# Allegro board SCHEDA ASSE.brd
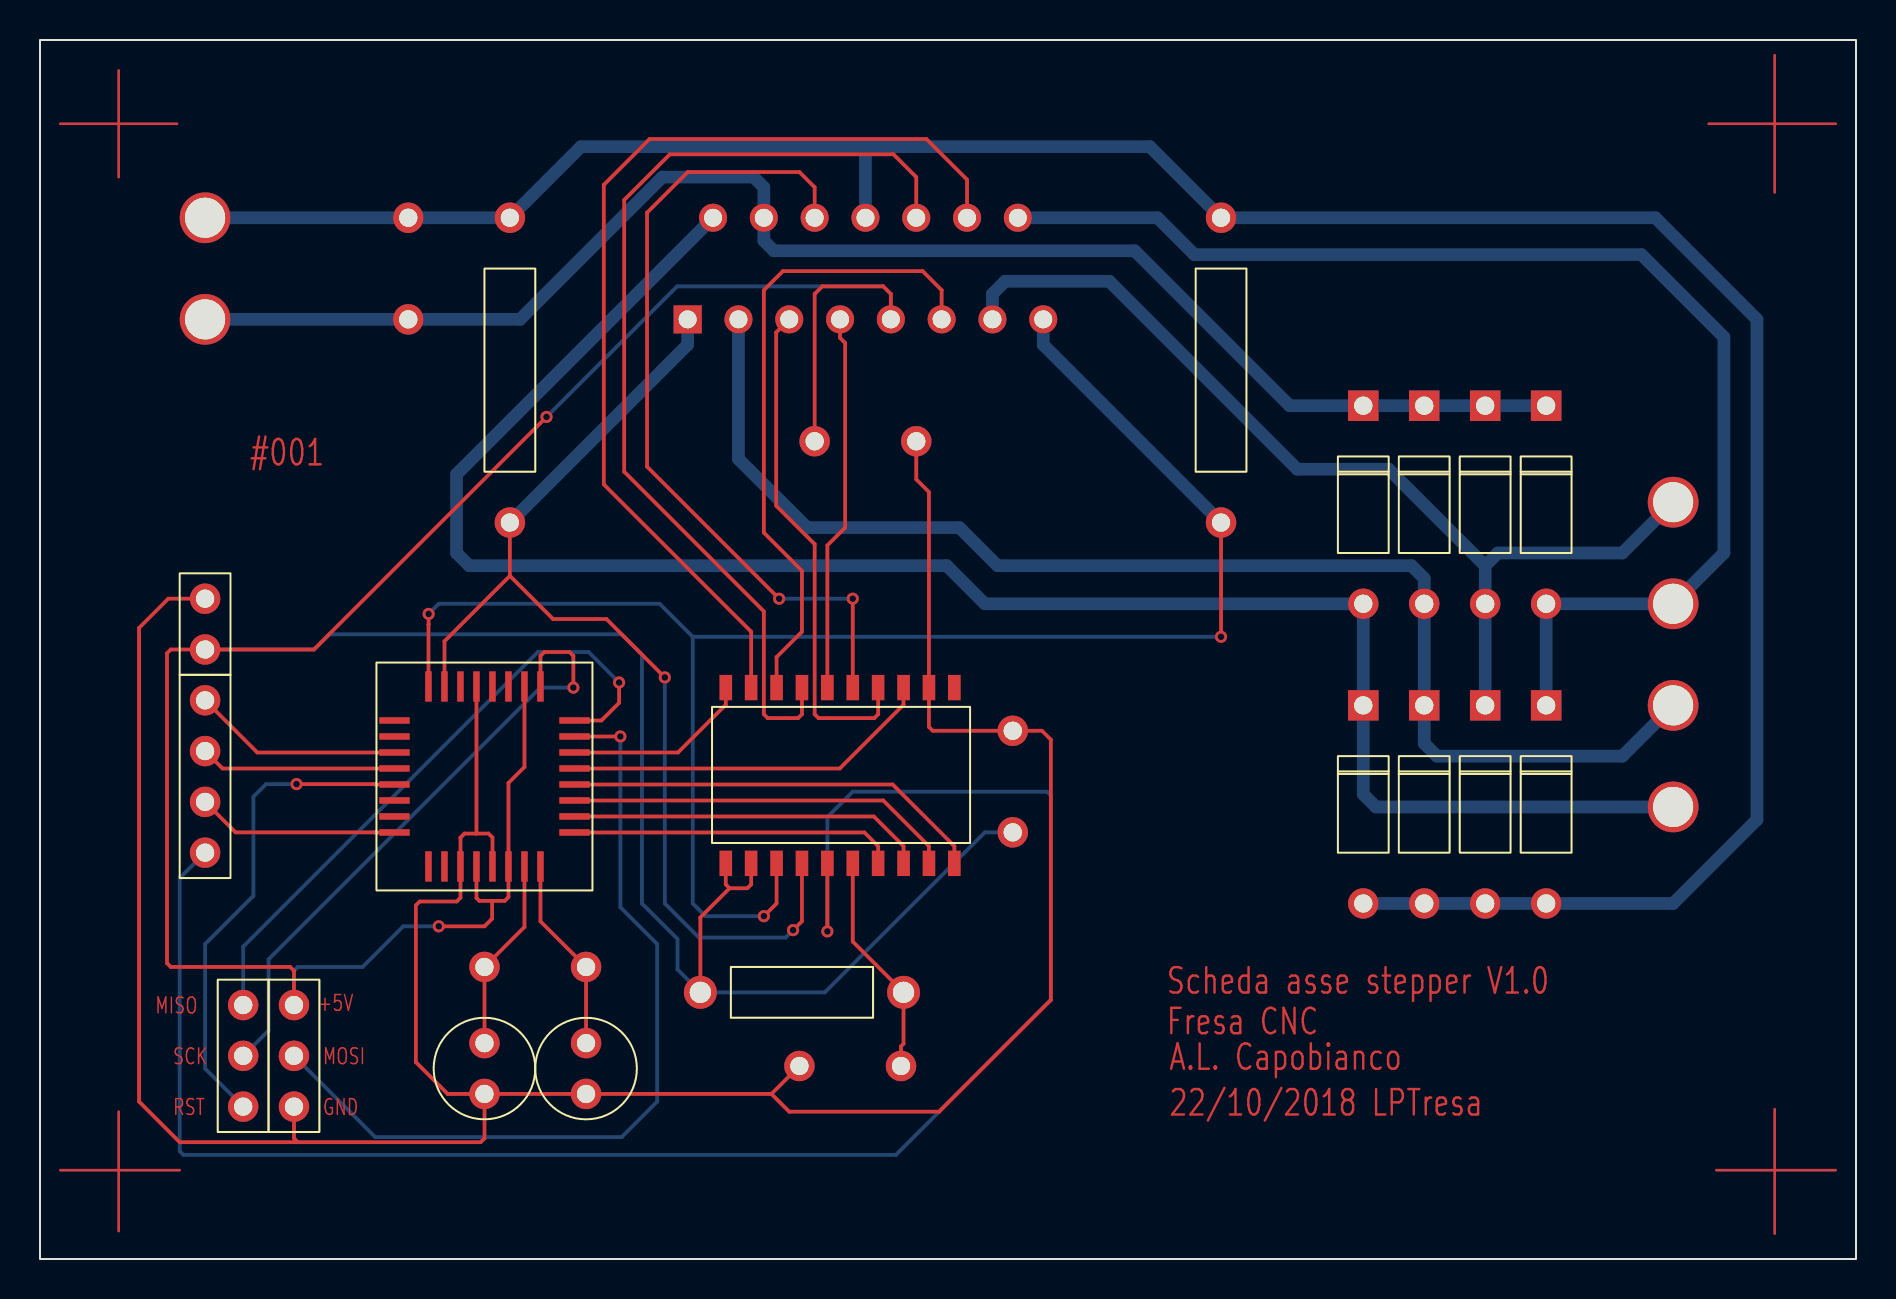
[diagram p0: board, top side]
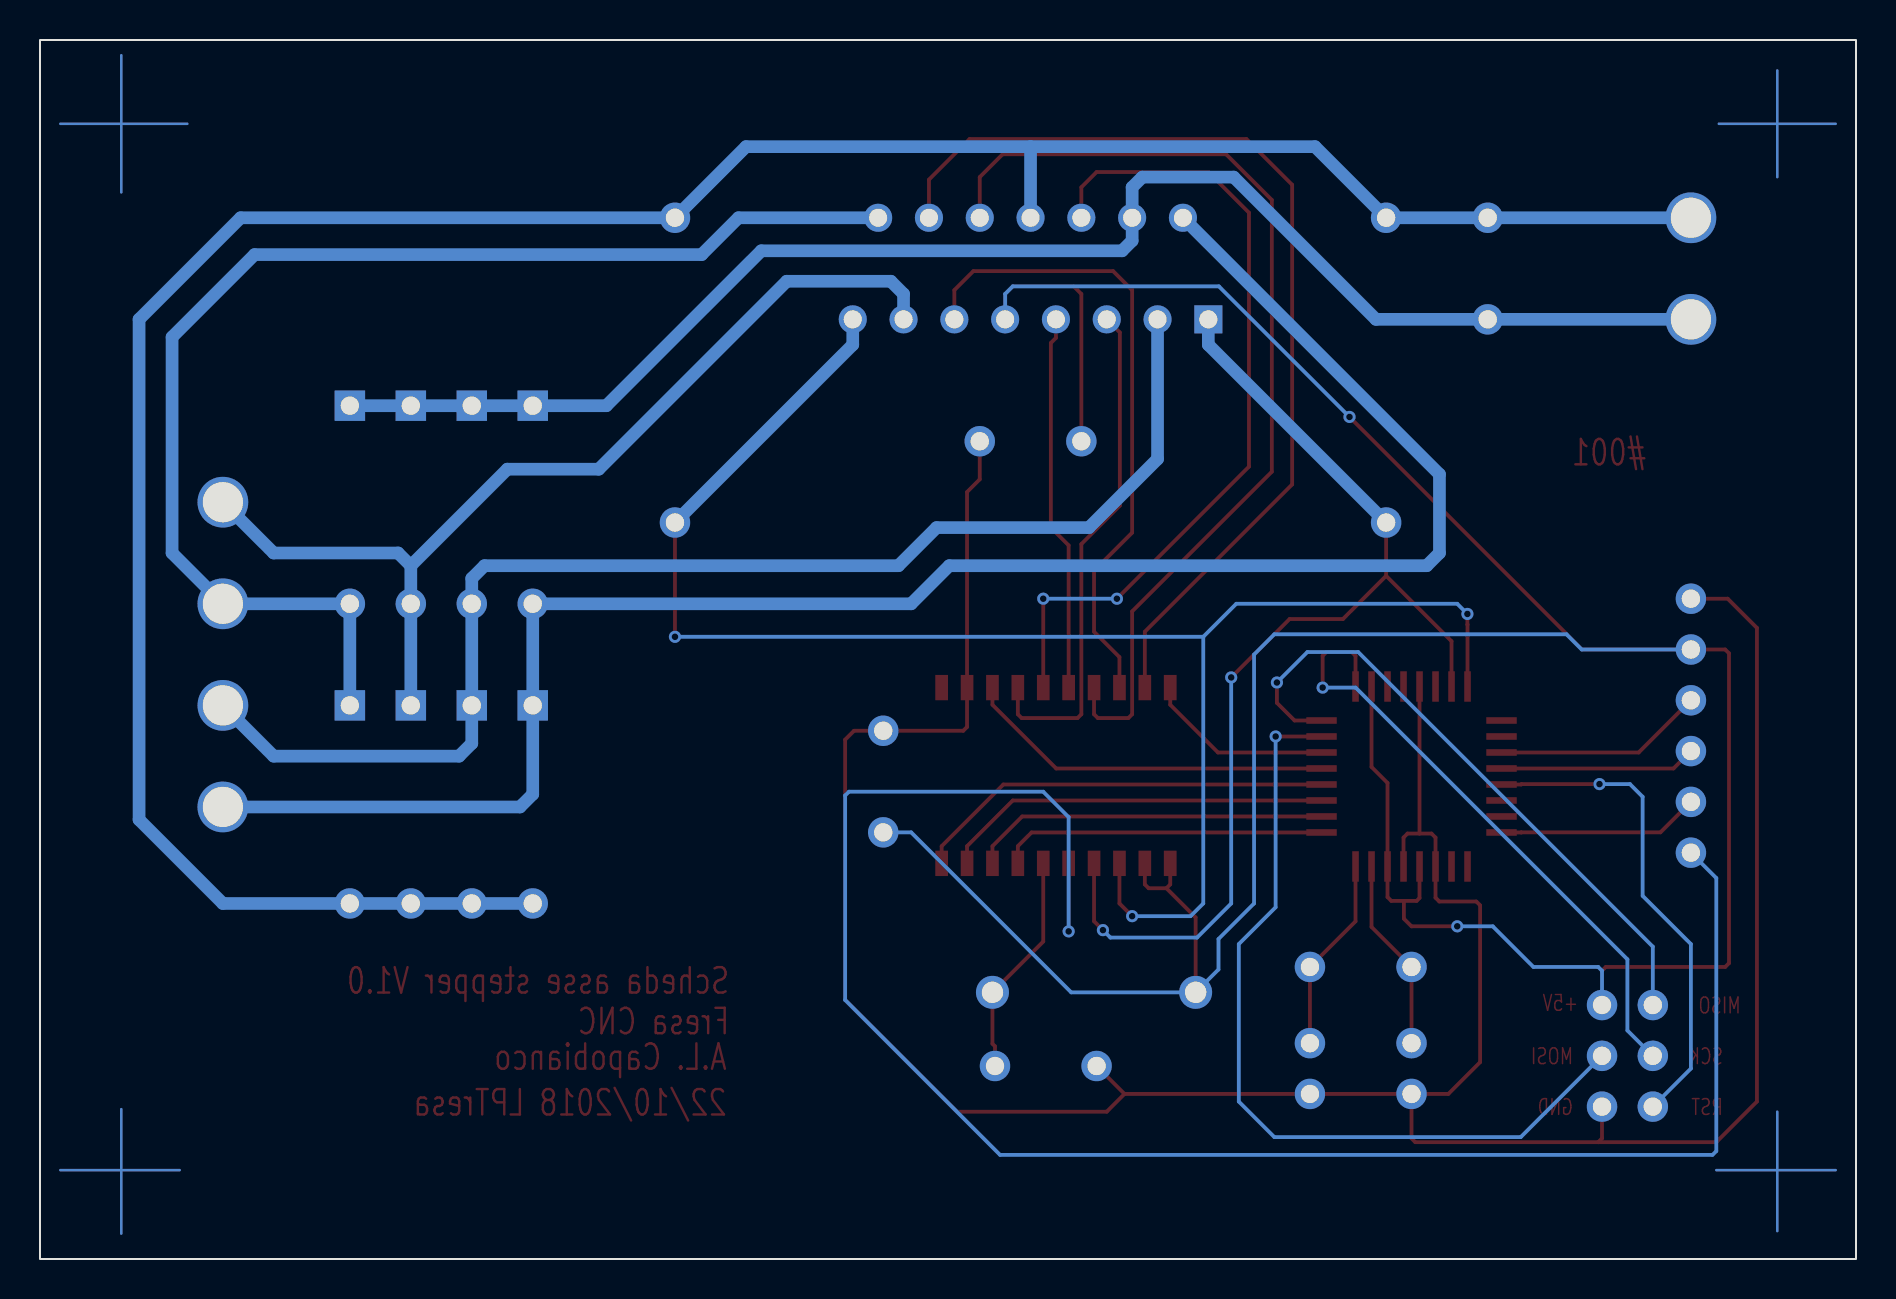
[diagram p1: board, bottom side, seen from below]

Outline 90.81 x 60.96 mm; copper layers: TOP, BOTTOM. Coordinates in mm from the lower left corner of the outline.
Outline path: rectangle 0,0 90.81,60.96

## Design rules (mm)
nets with their own width: min track width 0.191; nets +5V +24V CHOP REF EMERGENZA GND GND_EARTH MISO MOSI N00233 N00235 N00237 N00239 N00241 N00245 N02240 N02274 N02286 N02304 N09205 N09213 N18122 N18914 N18939 N18964 N18989 N19014 N19039 RESET S1 S2 SCK SCL SDA

## Placement (name value [footprint] x y rotation side)
C1  18pF  [CAP196]  22.22 8.25 0 top
C2  18pF  [CAP196]  27.31 8.25 0 top
C3  100nF  [CAP200RET]  38.74 40.89 0 top
C4  100nF  [CAP200RET]  18.41 52.07 270 top
C5  100nF  [CAP200RET]  48.64 21.34 90 top
C6  CAP  [CAP200RET]  43.05 9.65 180 top
D1  1N5822  [DO41]  66.17 42.67 180 top
D2  1N5822  [DO41]  69.21 42.67 180 top
D3  1N5822  [DO41]  72.26 42.67 180 top
D4  1N5822  [DO41]  75.31 42.67 180 top
D5  1N5822  [DO41]  66.17 27.69 180 top
D6  1N5822  [DO41]  69.21 27.69 180 top
D7  1N5822  [DO41]  72.26 27.69 180 top
D8  1N5822  [DO41]  75.31 27.69 180 top
J2  ALIM  [JUMPER2]  8.25 30.48 90 top
J3  POTENZA  [HEADER2]  8.25 46.99 90 top
J4  AVR ISP  [JUMPER3]  10.16 12.7 270 top
J5  CON3  [JUMPER3]  12.7 12.7 270 top
J6  CON2  [HEADER2]  81.66 22.61 90 top
J7  CON2  [HEADER2]  81.66 37.85 270 top
J9  SIGIN  [JUMPER4]  8.25 27.94 270 top
R1  0.5  [RES600]  23.5 49.53 0 top
R2  0.5  [RES600]  59.06 49.53 0 top
R3  RESISTOR  [RES400]  33.02 13.34 270 top
U1  ATMega328 TQFP  [TQFP32]  22.22 24.13 90 top
U2  L297  [SOIC20]  45.72 28.57 270 top
U3  L298  [DRIVER_L298N]  41.27 49.53 0 bottom
Y1  16MHz  [CAP200RET]  22.22 14.61 0 top

## Library data of the parts
C1 C2 C6 = CAP NP: Tolerance: ***; User Part Number: ***
C3-C5 = CAP NP_0: Tolerance: ***; User Part Number: ***
D1-D8 = DIODE
J2 = CON2: User Part Number: ***
J3 J6 J7 = CON2
J4 J5 = CON3: User Part Number: ***
J9 = CON4: User Part Number: ***
R1-R3 = RESISTOR: Tolerance: ***; User Part Number: ***
U1 = ATMega328 TQFP
U2 = L297: Tolerance: ***; User Part Number: ***
U3 = L298
Y1 = CRYSTAL: Tolerance: ***; User Part Number: ***

## Footprints (pads in the part's own frame, mm; a bottom-side part is the same pattern mirrored in y, then rotated)
CAP196
  round 1.524 hole 0.914: 1(0,0) 2(0,2.54)
CAP200RET
  round 1.524 hole 0.914: 1(0,0) 2(5.08,0)
DO41
  rect 1.524x1.524 hole 0.914: 1(0,0)
  round 1.524 hole 0.914: 2(0,9.906)
DRIVER_L298N
  rect 1.408x1.408 hole 0.9: 1(-8.89,2.54)
  round 1.408 hole 0.9: 2(-7.62,-2.54) 3(-6.35,2.54) 4(-5.08,-2.54) 5(-3.81,2.54) 6(-2.54,-2.54) 7(-1.27,2.54) 8(0,-2.54) 9(1.27,2.54) 10(2.54,-2.54) 11(3.81,2.54) 12(5.08,-2.54) 13(6.35,2.54) 14(7.62,-2.54) 15(8.89,2.54)
HEADER2
  round 2.54 hole 2.007: 1(0,0) 2(5.08,0)
JUMPER2
  round 1.524 hole 0.914: 1(0,0) 2(2.54,0)
JUMPER3
  round 1.524 hole 0.914: 1(0,0) 2(2.54,0) 3(5.08,0)
JUMPER4
  round 1.524 hole 0.914: 1(0,0) 2(2.54,0) 3(5.08,0) 4(7.62,0)
RES400
  round 1.651 hole 1.067: 1(0,0) 2(0,10.16)
RES600
  round 1.524 hole 0.914: 1(0,-12.7) 2(0,2.54)
SOIC20
  rect 1.27x0.635 smd: 1(0,0) 2(0,-1.27) 3(0,-2.54) 4(0,-3.81) 5(0,-5.08) 6(0,-6.35) 7(0,-7.62) 8(0,-8.89) 9(0,-10.16) 10(0,-11.43) 11(8.788,-11.43) 12(8.788,-10.16) 13(8.788,-8.89) 14(8.788,-7.62) 15(8.788,-6.35) 16(8.788,-5.08) 17(8.788,-3.81) 18(8.788,-2.54) 19(8.788,-1.27) 20(8.788,0)
TQFP32
  rect 1.524x0.33 smd: 1(-4.5,2.8) 2(-4.5,2) 3(-4.5,1.2) 4(-4.5,0.4) 5(-4.5,-0.4) 6(-4.5,-1.2) 7(-4.5,-2) 8(-4.5,-2.8) 17(4.5,-2.8) 18(4.5,-2) 19(4.5,-1.2) 20(4.5,-0.4) 21(4.5,0.4) 22(4.5,1.2) 23(4.5,2) 24(4.5,2.8)
  rect 0.33x1.524 smd: 9(-2.8,-4.5) 10(-2,-4.5) 11(-1.2,-4.5) 12(-0.4,-4.5) 13(0.4,-4.5) 14(1.2,-4.5) 15(2,-4.5) 16(2.8,-4.5) 25(2.8,4.5) 26(2,4.5) 27(1.2,4.5) 28(0.4,4.5) 29(-0.4,4.5) 30(-1.2,4.5) 31(-2,4.5) 32(-2.8,4.5)

## Nets
+5V: C3.1 C5.1 J2.1 J5.1 R3.1 U1.4(VCC#4) U1.6(VCC#6) U1.18(VCC#18) U2.11(CONTROL) U2.12(VS) U3.9(V+ (TTL))
+24V: C4.2 D1.1(K) D2.1(K) D3.1(K) D4.1(K) J3.1 U3.4(V+)
GND: C1.1 C2.1 C3.2 C5.2 C6.2 J2.2 J5.3 U1.3(GND#3) U1.5(GND#5) U1.21(GND#21) U2.2(GND)
GND_EARTH: C4.1 D5.2(A) D6.2(A) D7.2(A) D8.2(A) J3.2 R1.2 R2.2 U3.8(GND)
CHOP REF: J9.4 U2.15(VREF)
EMERGENZA: J9.3 U1.32(D2)
MISO: J4.1 U1.16(D12)
MOSI: J5.2 U1.15(D11 PWM)
RESET: J4.3 U1.29(RESET)
S1: R1.1 U1.23(A0) U2.14(SENS1) U3.1(SENSE A)
S2: R2.1 U1.24(A1) U2.13(SENS2) U3.15(SENSE B)
SCK: J4.2 U1.17(D13)
SCL: J9.2 U1.28(A5)
SDA: J9.1 U1.27(A4)
N00233: U2.4(A) U3.5(IN 1)
N00235: U2.5(ENO1) U3.6(EN A)
N00237: U2.6(B) U3.7(IN 2)
N00239: U2.7(C) U3.10(IN 3)
N00241: U2.9(D) U3.12(IN 4)
N00245: U2.8(ENO2) U3.11(EN B)
N02240: D1.2(A) D5.1(K) J6.1 U3.2(OUT 1)
N02274: D2.2(A) D6.1(K) J6.2 U3.3(OUT 2)
N02286: D3.2(A) D7.1(K) J7.1 U3.13(OUT 3)
N02304: D4.2(A) D8.1(K) J7.2 U3.14(OUT 4)
N09205: C1.2 U1.7(OSC1) Y1.1
N09213: C2.2 U1.8(OSC2) Y1.2
N18122: C6.1 R3.2 U2.16(OSC)
N18914: U1.14(D10 PWM) U2.10(ENABLE)
N18939: U1.13(D9 PWM) U2.3(HOME)
N18964: U1.9(D5 PWM) U2.17(CW/*CCW)
N18989: U1.10(D6 PWM) U2.18(*CLOCK)
N19014: U1.11(D7) U2.19(H/*F)
N19039: U1.12(D8) U2.20(*RESET)

Pads without a net: U1 1 2 19 20 22 25 26 30 31; U2 1

## Via types
v1: diameter 0.61, hole 0.33, TOP to BOTTOM, 14 vias

## Routing (per net, layer and track width the routed paths; a pad name or vN(x,y) marks a point on that pad's centre or on a via; arc(x,y) is an arc through that point)
+5V: length 178.4
  TOP w0.191: 35.56,19.79 35.56,18.73 35.37,18.54 34.48,18.54 ; 22.61,17.91 22.61,17.02 22.22,16.64 v1(19.94,16.64) ; 22.61,17.91 21.97,17.91 21.82,18.05 U1.4 ; 22.61,17.91 23.23,17.91 23.42,18.1 U1.6 23.42,23.81 24.22,24.61 U1.18 ; J5.1 12.7,14.41 12.51,14.61 6.54,14.61 6.35,14.8 6.35,30.29 6.54,30.48 J2.1 13.7,30.48 v1(25.33,42.11) ; U2.11 34.29,18.73 34.48,18.54 ; 34.48,18.54 33.02,17.08 R3.1 ; C3.1 38.74,48.26 39.12,48.64 42.16,48.64 42.54,48.26 U3.9
  BOTTOM w0.191: C5.1 47.24,21.34 39.24,13.34 R3.1 31.88,14.48 31.88,16 30.1,17.78 30.1,30.23 29.08,31.24 14.48,31.24 13.72,30.48 J2.1 ; v1(19.94,16.64) 18.16,16.64 16.13,14.61 12.89,14.61 12.7,14.41 J5.1 ; U3.9 42.54,48.26 42.16,48.64 31.86,48.64 v1(25.33,42.11)
+24V: length 76.3
  BOTTOM w0.635: D4.1 D3.1 D2.1 D1.1 62.48,42.67 54.74,50.42 36.7,50.42 36.19,50.92 U3.4 36.19,53.59 35.69,54.1 31.12,54.1 24,46.99 C4.2 J3.1
GND: length 144.7
  TOP w0.191: C1.1 22.22,6.03 22.03,5.84 12.89,5.84 ; C1.1 20.38,8.25 18.8,9.84 18.8,17.69 18.99,17.88 20.83,17.88 21.03,18.07 U1.3 21.03,21.08 21.23,21.28 21.82,21.28 ; C1.1 C2.1 36.58,8.25 ; J2.2 6.41,33.02 4.95,31.56 4.95,7.87 6.99,5.84 12.89,5.84 ; J5.3 12.7,6.03 12.89,5.84 ; C3.2 43.81,38.99 44.45,38.35 U2.2 44.45,26.61 44.64,26.42 C5.2 50.1,26.42 50.55,25.97 50.55,12.95 44.96,7.37 37.46,7.37 36.58,8.25 ; 36.58,8.25 C6.2 ; 21.82,21.28 22.42,21.28 22.63,21.08 U1.5 ; 21.82,21.28 U1.21
GND_EARTH: length 132.6
  BOTTOM w0.635: J3.2 C4.1 R1.2 27.05,55.63 41.27,55.63 ; D5.2 D6.2 D7.2 D8.2 81.66,17.78 85.85,21.97 85.85,46.99 80.77,52.07 R2.2 55.5,55.63 41.27,55.63 ; 41.27,55.63 U3.8
CHOP REF: length 93.4
  TOP w0.191: v1(39.37,16.38) U2.15
  BOTTOM w0.191: v1(39.37,16.38) 39.37,22.1 40.64,23.37 50.36,23.37 50.55,23.18 50.55,12.95 42.8,5.21 7.18,5.21 6.99,5.4 6.99,19.05 J9.4
EMERGENZA: length 10.1
  TOP w0.191: J9.3 9.78,21.34 16.73,21.34 16.74,21.33 U1.32
MISO: length 32.1
  TOP w0.191: U1.16 28.07,26.93 28.96,27.81 v1(28.96,28.83)
  BOTTOM w0.191: J4.1 10.16,15.62 24.89,30.35 27.43,30.35 v1(28.96,28.83)
MOSI: length 41.9
  TOP w0.191: v1(29.02,26.13) U1.15
  BOTTOM w0.191: v1(29.02,26.13) 29.02,17.59 30.86,15.75 30.86,7.87 29.08,6.1 16.76,6.1 J5.2
RESET: length 24.6
  TOP w0.191: U1.29 16.74,23.73 16.72,23.75 v1(12.83,23.75)
  BOTTOM w0.191: J4.3 8.25,9.53 8.25,15.75 10.67,18.16 10.67,23.11 11.3,23.75 v1(12.83,23.75)
S1: length 55.4
  TOP w0.191: U2.14 38.1,16.89 v1(37.66,16.45) ; R1.1 23.5,34.16 ; 23.5,34.16 20.23,30.89 U1.23 ; 23.5,34.16 25.65,32 28.32,32 v1(31.24,29.08)
  BOTTOM w0.191: v1(37.66,16.45) 37.28,16.07 32.95,16.07 31.24,17.78 v1(31.24,29.08)
  BOTTOM w0.635: R1.1 32.38,45.72 U3.1
S2: length 83.8
  TOP w0.191: U2.13 36.83,17.78 v1(36.19,17.15) ; R2.1 v1(59.06,31.12) ; U1.24 19.42,31.72 19.43,31.73 v1(19.43,32.26)
  BOTTOM w0.191: v1(36.19,17.15) 33.27,17.15 32.64,17.78 32.64,31.12 ; v1(59.06,31.12) 32.64,31.12 ; 32.64,31.12 30.99,32.77 19.94,32.77 v1(19.43,32.26)
  BOTTOM w0.635: U3.15 50.16,45.72 R2.1
SCK: length 31.1
  TOP w0.191: v1(26.67,28.57) 26.67,30.16 26.48,30.35 25.22,30.35 25.03,30.16 U1.17
  BOTTOM w0.191: J4.2 11.43,11.43 11.43,14.99 25.02,28.57 v1(26.67,28.57)
SCL: length 9.8
  TOP w0.191: J9.2 9.12,24.53 U1.28
SDA: length 10.6
  TOP w0.191: U1.27 10.87,25.33 J9.1
N00233: length 25.5
  TOP w0.191: U3.5 36.81,46.33 36.81,37.68 38.74,35.75 38.74,27.24 38.93,27.05 41.72,27.05 41.91,27.24 U2.4
N00235: length 41.2
  TOP w0.191: U3.6 38.74,53.59 37.97,54.36 32.38,54.36 30.35,52.32 30.35,39.62 v1(36.96,33.02) ; U2.5 v1(40.64,33.02)
  BOTTOM w0.191: v1(36.96,33.02) v1(40.64,33.02)
N00237: length 18.9
  TOP w0.191: U2.6 39.37,35.69 40.26,36.58 40.26,45.81 40,46.06 U3.7
N00239: length 50.1
  TOP w0.191: U3.10 43.81,54.1 42.67,55.25 31.5,55.25 29.21,52.96 29.21,39.37 36.19,32.38 36.19,27.24 36.39,27.05 37.91,27.05 38.1,27.24 U2.7
N00241: length 50.1
  TOP w0.191: U3.12 46.35,53.98 44.32,56.01 30.48,56.01 28.19,53.72 28.19,38.74 35.56,31.37 35.56,28.57
N00245: length 32.3
  TOP w0.191: U3.11 45.08,48.45 44.13,49.4 37.15,49.4 36.19,48.45 36.19,36.32 38.1,34.42 38.1,31.37 36.83,30.1 U2.8
N02240: length 93.8
  BOTTOM w0.635: U3.2 20.83,39.24 20.83,35.31 21.46,34.67 45.34,34.67 47.24,32.77 D1.2 D5.1 66.17,23.24 66.8,22.61 J6.1
N02274: length 65.8
  BOTTOM w0.635: U3.3 34.93,40 38.35,36.58 45.97,36.58 47.88,34.67 68.58,34.67 69.21,34.04 D2.2 D6.1 69.21,25.78 69.85,25.15 79.12,25.15 J6.2
N02286: length 49.8
  BOTTOM w0.635: 72.26,34.67 D3.2 D7.1 ; 72.26,34.67 67.44,39.5 62.87,39.5 53.47,48.9 48.26,48.9 47.62,48.26 U3.13 ; 72.26,34.67 72.9,35.31 79.12,35.31 J7.1
N02304: length 63.6
  BOTTOM w0.635: D8.1 D4.2 J7.2 84.2,35.31 84.2,46.1 80.07,50.23 57.72,50.23 55.88,52.07 U3.14
N09205: length 9.7
  TOP w0.191: U1.7 24.22,16.6 Y1.1 C1.2
N09213: length 9.8
  TOP w0.191: C2.2 Y1.2 25.03,16.88 U1.8
N18122: length 11.2
  TOP w0.191: C6.1 43.05,10.64 43.18,10.76 R3.2 40.64,15.88 U2.16
N18914: length 9.4
  TOP w0.191: U2.10 34.29,27.72 31.9,25.33 U1.14
N18939: length 18.6
  TOP w0.191: 43.18,28.57 43.18,27.72 39.99,24.53 U1.13
N18964: length 16.3
  TOP w0.191: U1.9 41.22,21.33 41.91,20.64 U2.17
N18989: length 17.9
  TOP w0.191: 43.18,19.79 43.18,20.64 41.69,22.13 U1.10
N19014: length 19.5
  TOP w0.191: U1.11 42.16,22.93 44.45,20.64 U2.19
N19039: length 21.1
  TOP w0.191: U2.20 45.72,20.64 42.63,23.73 U1.12

## Text on the board
TOP: MISO | SCK | RST | +5V | MOSI | GND | #001 | Scheda asse stepper V1.0 | Fresa CNC | A.L. Capobianco | 22/10/2018 LPTresa
